# EAGLE board ba662 (EAGLE 7.5.0)

Size 160 x 100 mm. Coordinates in mm from the lower left corner, seen from the top.
Outline: 0,100 0,0 160,0 160,100 0,100
Outline: 0,100 0,100
Copper layers (1*16): Top 0.035mm / dielectric 1.5mm / Bottom 0.035mm
Design rules "default *": minimum track width 10mil, minimum drill 0.61mm, track to track 8mil, track to pad 8mil, pad to pad 8mil, via to via 8mil, smd to smd 8mil, copper to edge 40mil, drill to drill 8mil, minimum pad ring 0mil, minimum via ring 8mil, stop-mask expansion 2mil, vias tented up to drill 19mil, thermal gap 10mil
Net classes: 0 default: width 0.33 mm, clearance 0.33 mm

## Footprints (pad centres in the part's own frame; a part is rotated, then mirrored left to right if it is on the bottom)
SOT363 = smd 0.42 x 0.7: P$1 -0.65,-0.9; P$2 0,-0.9; P$3 0.65,-0.9; P$4 0.65,0.9; P$5 0,0.9; P$6 -0.65,0.9
SOT363_Q10 = smd 0.42 x 0.7: P$1 -0.65,-0.9; P$2 0,-0.9; P$3 0.65,-0.9; P$4 0.65,0.9; P$5 0,0.9; P$6 -0.65,0.9
0603-SM = smd 0.889 x 1.016: P$1 -0.826,0; P$2 0.826,0

## Placement (x,y rotation side)
Q1  SOT363  [SOT363]  23.7,20.5 90 top
Q2  SOT363  [SOT363_Q10]  23.7,25.7 270 top
Q3  SOT363  [SOT363_Q10]  19.9,31.1 180 top
Q4  SOT363  [SOT363_Q10]  14.5,30.9 270 top
Q5  SOT363  [SOT363_Q10]  25.1,31.1 0 top
Q6  SOT363  [SOT363_Q10]  29.1,25.6 0 top
Q7  SOT363  [SOT363_Q10]  30.3,31.1 180 top
Q9  SOT363  [SOT363_Q10]  34.3,25.6 0 top
Q10  SOT363  [SOT363_Q10]  18.3,22.1 180 top
R20  50kΩ  [0603-SM]  33.6,20 90 top
R21  11kΩ  [0603-SM]  13.6,25.5 270 top

## Library data of the parts
Q1-Q7 Q9 Q10 R20 R21 = common

## Nets
N$2: Q1.P$4 Q1.P$5 Q6.P$4 Q6.P$5 Q9.P$4 Q9.P$5 Q10.P$6
N$87: Q1.P$1 Q1.P$2 Q1.P$6
N$91: Q1.P$3 Q2.P$4 Q2.P$5
N$94: Q4.P$1 Q4.P$2 Q4.P$3 Q5.P$5
N$95: Q3.P$1 Q3.P$2 Q3.P$3 Q5.P$4
N$96: Q2.P$3 Q4.P$6 Q5.P$1
N$97: Q6.P$1 Q6.P$2 Q6.P$3 Q7.P$4
N$98: Q5.P$6 Q7.P$3
N$100: Q2.P$6 Q3.P$6 Q5.P$2
N$101: Q5.P$3 Q6.P$6 Q7.P$2
N$102: Q9.P$1 Q9.P$2 Q9.P$3 R20.P$2
N$103: Q7.P$5 Q9.P$6 Q10.P$1
N$105: Q10.P$5 R21.P$2
V+: Q3.P$4 Q3.P$5 Q4.P$4 Q4.P$5 Q7.P$6 R21.P$1

## Text on the board
tPlace: Q4 | Q3 | Q7 | Q5 | R21 | Q2 | Q6 | Q9 | Q10 | Q1 | R20